# Altium PCB PCB1.PcbDoc
Units mm, origin at the board's own origin, x right, y up, seen from the top; angles counter-clockwise.
Board outline 86 x 56 mm, 2 copper layers (Top Layer, Bottom Layer), stack 1.771 mm thick; 8 components, 56 nets, 96 pads, 19 vias.
Unrouted connection lines stored in the file: 1.
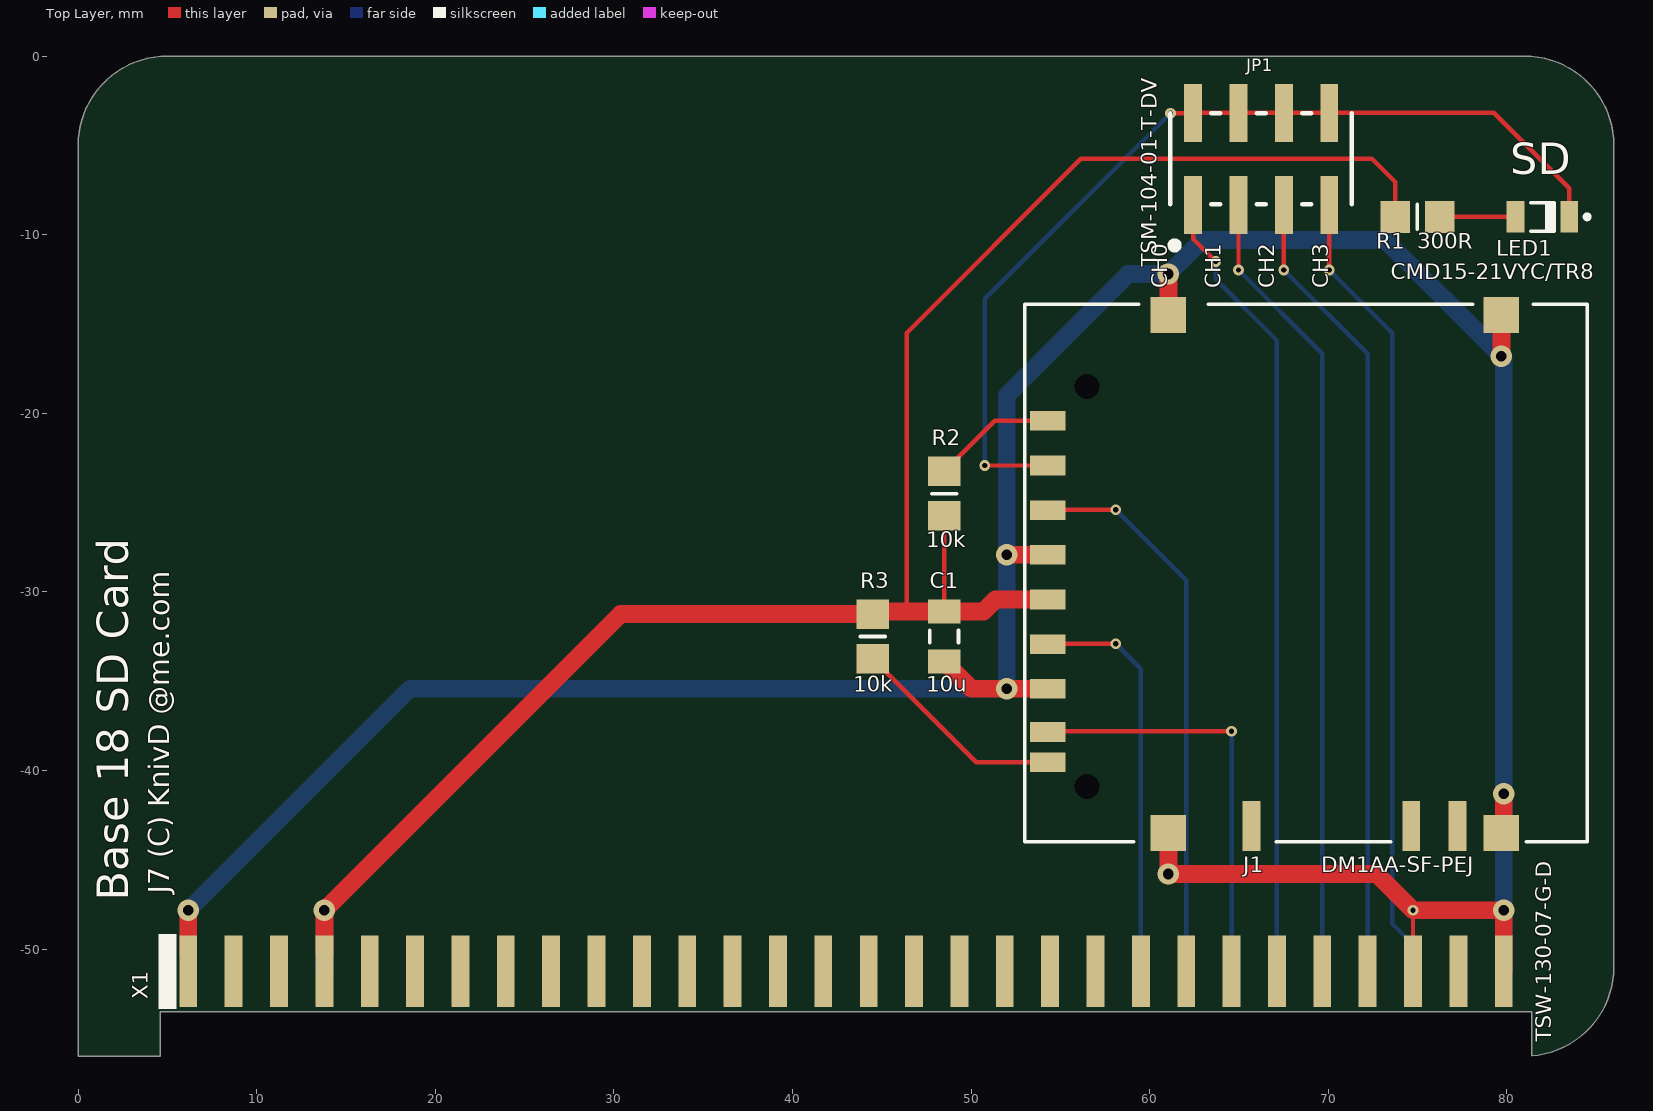
[diagram p0: Top Layer view]
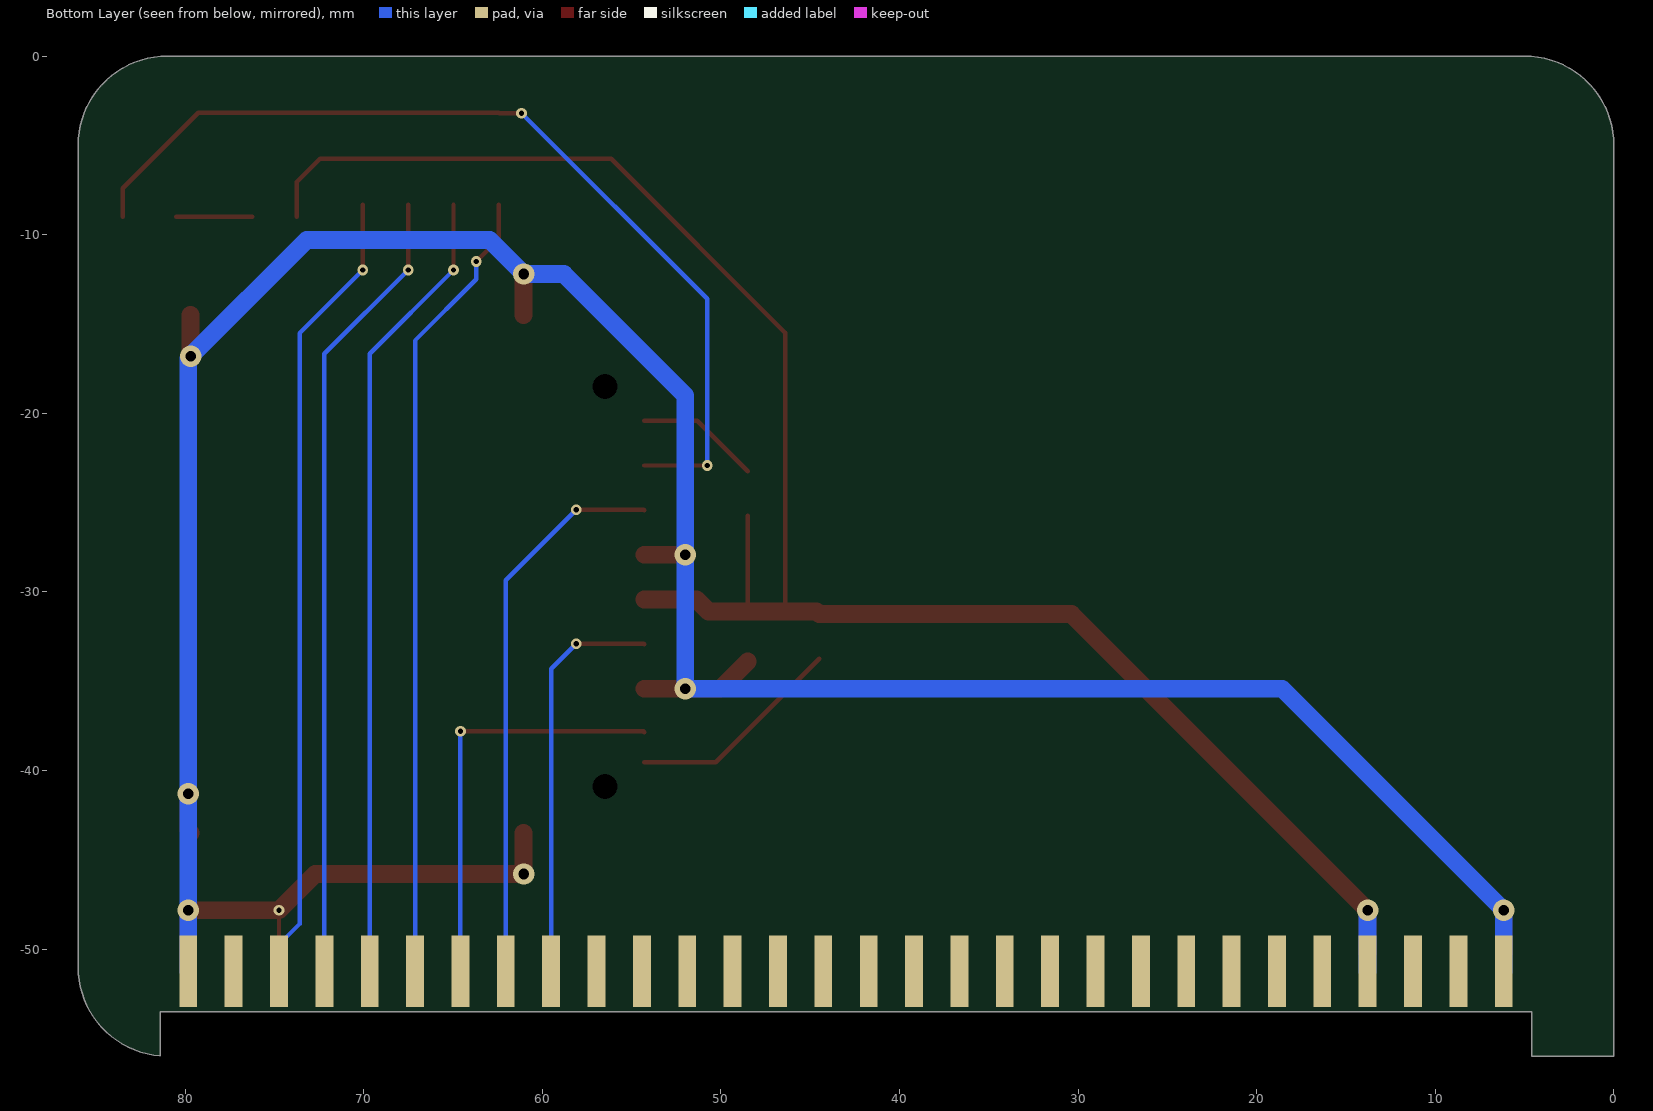
[diagram p1: Bottom Layer view, seen from below]
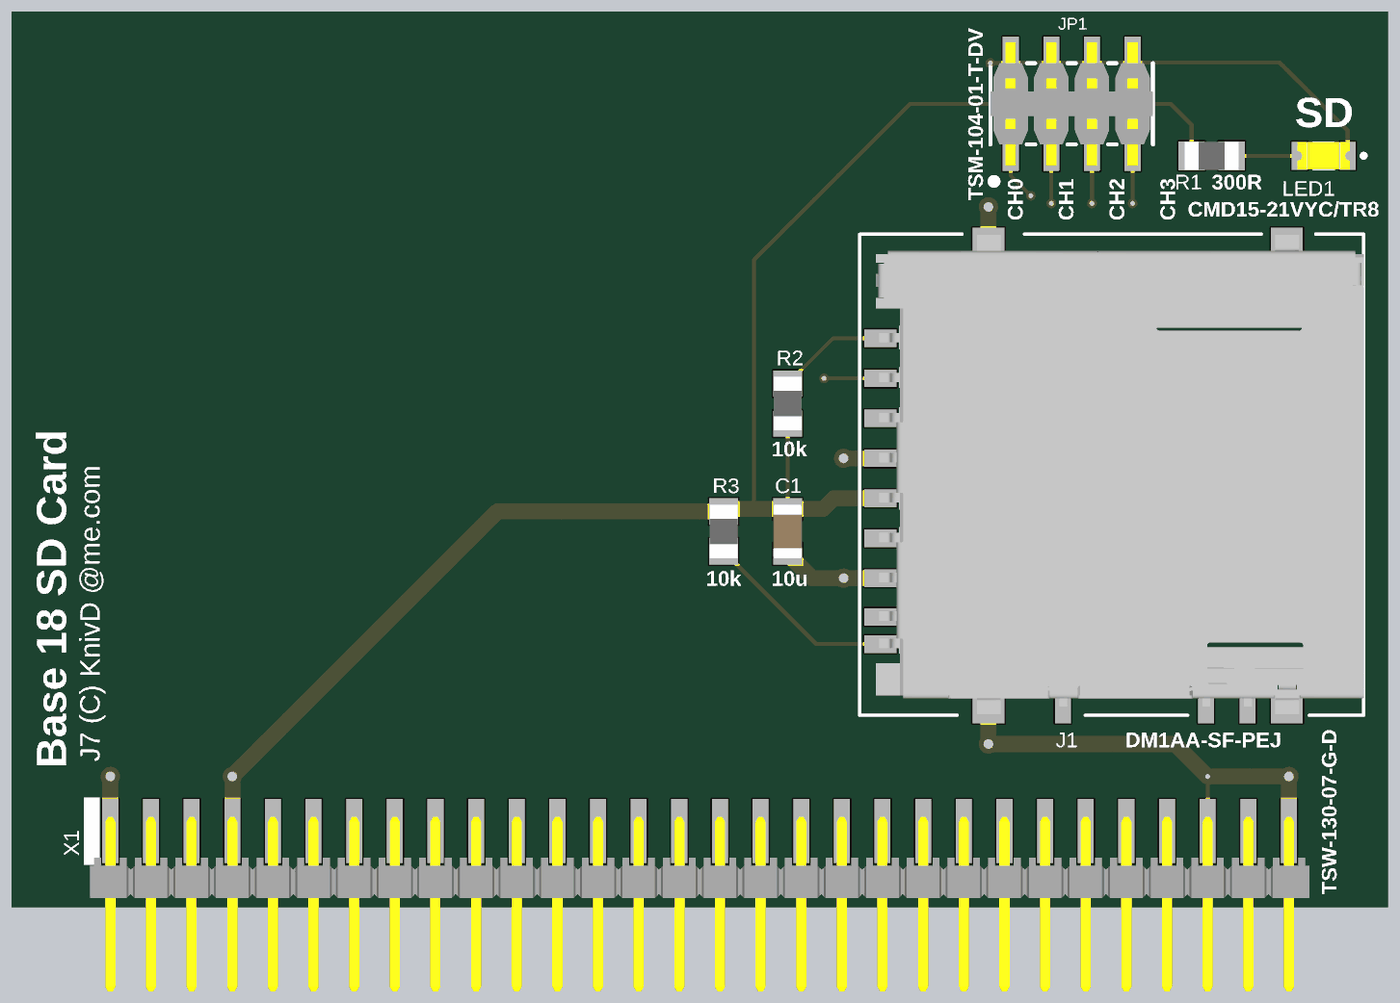
[diagram p2: 3D render of the assembled board from above, using the file's embedded part models]

## Layer stack, top to bottom
Top Solder: solder mask 0.0102, Solder Resist, Dk 3.5
Top Layer: signal copper 0.0356
Dielectric 1: core 1.7, FR-4, Dk 4.2
Bottom Layer: signal copper 0.0356
Solder Side: solder mask 0.0102, Solder Resist, Dk 3.5

## Board outline
0,-56 0,-5 cw(c5,-5) 5,0 81,0 cw(c81,-5) 86,-5 86,-51 cw(c81,-51) 81.399,-55.984 81.4,-55.984 81.4,-53.5 4.6,-53.5 4.6,-56

## Design rules (kind name [scope] priority, off if disabled: settings)
Clearance Clearance_Pour [IsRegion] p1: gap=0.3 ignorepadtopadclearanceinfootprint=TRUE
Clearance [All] p2: gap=0.2 ignorepadtopadclearanceinfootprint=TRUE
Height [All] p1: minheight=0 maxheight=100 prefheight=12.7
HoleSize [All] p1: absolutevalues=TRUE maxlimit=5 minlimit=0.025 maxpercent=80.000 minpercent=20.000
HoleToHoleClearance [All] p1: gap=0 allowstackedmicrovias=TRUE
MinimumSolderMaskSliver [All] p1: minsoldermaskwidth=0
PolygonConnect [All] p1: thpad.connectstyle=Relief thpad.reliefconductorwidth=0.25 thpad.reliefentries=4 thpad.polygonreliefangle="90 Angle" thpad.airgapwidth=0.25 smdpad.connectstyle=Relief smdpad.reliefconductorwidth=0.25 smdpad.reliefentries=4 smdpad.polygonreliefangle="90 Angle" smdpad.airgapwidth=0.25 via.connectstyle=Direct via.reliefconductorwidth=0.254 via.reliefentries=4 via.polygonreliefangle="45 Angle" via.airgapwidth=0.254
RoutingVias [All] p1: holewidth=0.3 width=0.6 viastyle="Through Hole" minholewidth=0.25 minwidth=0.5 maxholewidth=1.5 maxwidth=3
SilkToSilkClearance [All] p1: silktosilkclearance=-10
SilkToSolderMaskClearance [IsPad] p1: minsilkscreentomaskgap=-10 clearancetoexposedcopper=TRUE
SolderMaskExpansion SolderMaskExpansion_VIA [IsVia] p1: expansion=-0.3 soldermaskfromhole=TRUE
SolderMaskExpansion [All] p2: expansion=0.102
Width [All] p1: maxlimit=10 minlimit=0.2 preferedwidth=0.25
24 further rules are at their usual default settings.

## Components (designator, comment, footprint, x,y, rotation, side; value= is the part's Value field where it differs from the comment)
C1 "10u" CAPC3216X110N 48.5,-32.5 r270 top locked
J1 "DM1AA-SF-PEJ" DM1AA-SF-PEJ 67,-29 r90 top locked
JP1 "TSM-104-01-T-DV" 2015-2X04XD 66.25,-5.75 r0 top
LED1 "CMD15-21VYC/TR8" LED_OSRAM_LYN971 82,-9 r180 top locked
R1 "300R" RESC3216X75N 75,-9 r180 top locked
R2 "10k" RESC3216X75N 48.5,-24.5 r270 top locked
R3 "10k" RESC3216X75N 44.5,-32.5 r90 top locked
X1 "TSW-130-07-G-D" DIL60-M-EDGE 43,-50.45 r0 top locked

## Footprints (in the part's own frame and the unit in brackets; to place one, negate y for a bottom-side part, rotate by r counter-clockwise, add the part's x,y. Pads: shape width x height; smd on the part's side, far side on the other; paste and mask are expansions set on the pad)
2015-2X04XD [mm] "Pin Header, 2.54mm x 2.54mm"
  rect 1x3.25 smd: 1(-3.81,-2.575) 2(-3.81,2.575) 3(-1.27,-2.575) 4(-1.27,2.575) 5(1.27,-2.575) 6(1.27,2.575) 7(3.81,-2.575) 8(3.81,2.575)
  silkscreen extent -5.08,-5.05 5.08,2.54, body extent -5.08,-3.85 5.08,3.85, height 9.65
CAPC3216X110N [mm] "Chip Capacitor, Body 3.2x1.6mm, IPC Medium Density"
  rect 1.35x1.8 smd: 1(-1.4,0) 2(1.4,0)
  silkscreen extent -0.35,-0.8 0.35,0.8, body extent -1.7,-0.9 1.7,0.9, height 1.1
DIL60-M-EDGE [mm] "DIL60 header soldered as edge connector"
  rect 1x4 smd: 1(-36.83,-0.8) 3(-34.29,-0.8) 5(-31.75,-0.8) 7(-29.21,-0.8) 9(-26.67,-0.8) 11(-24.13,-0.8) 13(-21.59,-0.8) 15(-19.05,-0.8) 17(-16.51,-0.8) 19(-13.97,-0.8) 21(-11.43,-0.8) 23(-8.89,-0.8) 25(-6.35,-0.8) 27(-3.81,-0.8) 29(-1.27,-0.8) 31(1.27,-0.8) 33(3.81,-0.8) 35(6.35,-0.8) 37(8.89,-0.8) 39(11.43,-0.8) 41(13.97,-0.8) 43(16.51,-0.8) 45(19.05,-0.8) 47(21.59,-0.8) 49(24.13,-0.8) 51(26.67,-0.8) 53(29.21,-0.8) 55(31.75,-0.8) 57(34.29,-0.8) 59(36.83,-0.8)
  rect 1x4 smd far side: 2(-36.83,-0.8) 4(-34.29,-0.8) 6(-31.75,-0.8) 8(-29.21,-0.8) 10(-26.67,-0.8) 12(-24.13,-0.8) 14(-21.59,-0.8) 16(-19.05,-0.8) 18(-16.51,-0.8) 20(-13.97,-0.8) 22(-11.43,-0.8) 24(-8.89,-0.8) 26(-6.35,-0.8) 28(-3.81,-0.8) 30(-1.27,-0.8) 32(1.27,-0.8) 34(3.81,-0.8) 36(6.35,-0.8) 38(8.89,-0.8) 40(11.43,-0.8) 42(13.97,-0.8) 44(16.51,-0.8) 46(19.05,-0.8) 48(21.59,-0.8) 50(24.13,-0.8) 52(26.67,-0.8) 54(29.21,-0.8) 56(31.75,-0.8) 58(34.29,-0.8) 60(36.83,-0.8)
  silkscreen extent -38.5,-2.9 -37.5,1.3, body extent -38.1,-10.83 38.1,0.09, height 1.64
DM1AA-SF-PEJ [mm] "HIROSE SD card push-push socket"
  rect 2x2 smd: 0(-14.5,-12.7) 0(-14.5,5.95) 0(14.5,-12.7) 0(14.5,5.95)
  round 0 hole 1.4: 0(-11.9,10.5) 0(10.5,10.5)
  rect 1.1x2 smd: 1(6.075,12.7) 2(3.575,12.7) 3(1.075,12.7) 4(-1.425,12.7) 5(-3.925,12.7) 6(-6.425,12.7) 7(-8.85,12.7) 8(-10.55,12.7) 9(8.575,12.7)
  rect 2.8x1 smd: COM(-14.1,-10.25) DET(-14.1,1.3) WP(-14.1,-7.65)
  silkscreen extent -15,-17.5 15.1,14, body extent -14.95,-17.52 15.05,12.98, height 2.88
LED_OSRAM_LYN971 [mm] "Yellow Chip LED, 2-Leads, Body 3.2 x1.6mm, IPC Medium Density"
  rect 1x1.75 smd: 1(-1.5,0) 2(1.5,0)
  silkscreen extent -2.63,-0.8 0.65,0.8, body extent -1.65,-0.85 1.65,0.85, height 1.2
RESC3216X75N [mm] "Chip Resistor, EIA 1206, Metric 3216, Body 3.2x1.6mm, IPC Medium Density"
  rect 1.65x1.8 smd: 1(-1.25,0) 2(1.25,0)
  silkscreen extent 0,-0.7 0,0.7, body extent -1.67,-0.87 1.68,0.88, height 0.75

## Part data
C1: library part Capacitor, "Capacitor"
J1: library part "SD (w/ card detect and WP)", "SD card connector"
JP1: library part "Jumper 4x2", "2.54mm square pin header/jumper"
LED1: library part LED, "Light Emitting Diode"
R1 R2 R3: library part Resistor, "Resistor"
X1: library part "Connector 2x30", "Dual row, 60-way connector"

## Via types
v1: diameter 0.6, hole 0.3, Top Layer to Bottom Layer, tented both sides, 10 vias
v2: diameter 1.2, hole 0.6, Top Layer to Bottom Layer, tented both sides, 9 vias

## Nets (pads, with @x,y where several pads share a name; then routed paths per layer and width w, separated by ;. In a path a pad name is that pad's centre, name@x,y a point inside that pad or via, vN(x,y) a via of type N, cw(c..) or ccw(c..) an arc to the next point about the centre after c; other vN are vias at no path point)
+3V3: C1.1 J1.4 R1.2 R2.2 R3.2 X1.7 X1.8 | length 108.4
  Top Layer w0.25: 46.4,-31.1 46.4,-15.5 56.15,-5.75 72.45,-5.75 73.75,-7.05 R1.2 ; C1.1 R2.2
  Top Layer w1: X1.7@13.79,-50.25 v2(13.79,-47.83) 30.37,-31.25 R3.2 44.65,-31.1 C1.1 50.7,-31.1 51.375,-30.425 J1.4
  Bottom Layer w1: X1.8 v2(13.79,-47.83)
+Vin: X1.57 X1.58
A00: X1.15
A01: X1.17
A02: X1.19
A03: X1.21
A04: X1.23
A05: X1.25
A06: X1.27
A07: X1.29
A08: X1.31
A09: X1.33
A10: X1.35
A11: X1.37
A12: X1.16
A13: X1.18
A14: X1.20
A15: X1.22
A16: X1.24
A17: X1.26
A18: X1.28
A19: X1.30
A20: X1.32
A21: X1.34
A22: X1.36
A23: X1.38
BUS#: X1.10
DB0: X1.39
DB1: X1.41
DB2: X1.43
DB3: X1.45
DB4: X1.47
DB5: X1.49
DB6: X1.51
DB7: X1.53
GND: C1.2 J1.0@61.05,-14.5 J1.0@61.05,-43.5 J1.0@79.7,-14.5 J1.0@79.7,-43.5 J1.3 J1.6 X1.1 X1.2 X1.55 X1.59 X1.60 | length 186.1
  Top Layer w0.25: X1.55 v1(74.75,-47.83)
  Top Layer w1: X1.1@6.17,-50.25 v2(6.17,-47.83) ; C1.2 50.025,-35.425 v2(52,-35.425) J1.6 ; v2(52,-27.925) J1.3 ; J1.0@61.05,-43.5 v2(61.05,-45.8) 72.72,-45.8 v1(74.75,-47.83) v2(79.83,-47.83) X1.59 ; J1.0@61.05,-14.5 v2(61.05,-12.2) ; J1.0@79.7,-43.5 79.83,-43.37 v2(79.83,-41.3) ; v2(79.7,-16.8) J1.0@79.7,-14.5
  Bottom Layer w1: X1.2 v2(6.17,-47.83) 18.575,-35.425 v2(52,-35.425) v2(52,-27.925) 52,-19 58.8,-12.2 v2(61.05,-12.2) 62.95,-10.3 73.2,-10.3 v2(79.7,-16.8) 79.83,-16.93 v2(79.83,-41.3) v2(79.83,-47.83) X1.60
INT0#: X1.9
INT1#: X1.11
INT2#: X1.13
MCLR#: X1.5
MISO: J1.7 X1.48 | length 23.7
  Top Layer w0.25: J1.7 54.34,-37.81 v1(64.59,-37.81)
  Bottom Layer w0.25: X1.48 v1(64.59,-37.81)
MOSI: J1.2 X1.46 | length 31.3
  Top Layer w0.25: J1.2 54.325,-25.4 v1(58.1,-25.4)
  Bottom Layer w0.25: v1(58.1,-25.4) 62.05,-29.35 X1.46
NetJ1_8: J1.8 R3.1 | length 12.2
  Top Layer w0.25: R3.1 50.3,-39.55 J1.8
NetJ1_9: J1.9 R2.1 | length 7
  Top Layer w0.25: R2.1 51.325,-20.425 J1.9
NetLED1_2: LED1.2 R1.1 | length 4.2
  Top Layer w0.25: R1.1 LED1.2
RD#: X1.14
RESET#: X1.6
RXD: X1.42
SCLK: J1.5 X1.44 | length 22.7
  Top Layer w0.25: J1.5 54.325,-32.9 v1(58.1,-32.9)
  Bottom Layer w0.25: v1(58.1,-32.9) 59.51,-34.31 X1.44
SD#: J1.1 JP1.2 JP1.4 JP1.6 JP1.8 LED1.1 | length 53.2
  Top Layer w0.25: v1(50.775,-22.925) J1.1 ; v1(61.17,-3.2) 62.415,-3.2 JP1.2 JP1.4 JP1.6 JP1.8 79.275,-3.175 83.5,-7.4 LED1.1
  Bottom Layer w0.25: v1(50.775,-22.925) 50.775,-13.595 v1(61.17,-3.2)
SEL0#: JP1.1 X1.50 | length 44.9
  Top Layer w0.25: JP1.1 62.44,-10.24 v1(63.7,-11.5)
  Bottom Layer w0.25: v1(63.7,-11.5) 63.7,-12.5 67.13,-15.93 X1.50
SEL1#: JP1.3 X1.52 | length 44.9
  Top Layer w0.25: v1(64.98,-11.98) JP1.3
  Bottom Layer w0.25: v1(64.98,-11.98) 69.67,-16.67 X1.52
SEL2#: JP1.5 X1.54 | length 44.9
  Top Layer w0.25: v1(67.52,-11.98) JP1.5
  Bottom Layer w0.25: v1(67.52,-11.98) 72.21,-16.67 X1.54
SEL3#: JP1.7 X1.56 | length 44.9
  Top Layer w0.25: v1(70.06,-11.98) JP1.7
  Bottom Layer w0.25: v1(70.06,-11.98) 73.6,-15.52 73.6,-48.6 74.75,-49.75 X1.56
TXD: X1.40
WR#: X1.12
pads on no net: J1.0@56.5,-18.5 J1.0@56.5,-40.9 J1.COM J1.DET J1.WP X1.3 X1.4

## Silkscreen, mask and mechanical layers (free items; w line width, h text height)
Top Overlay:
  text "SD" at 80.2,-7.2 h3
  text "CH0 /  / CH1 /  / CH2 /  / CH3" at 70.3,-13 h1.5 r90
  text "J7 (C) KnivD @me.com" at 5.5,-46.9 h2 r90
  text "Base 18 SD Card" at 3.4,-47.3 h3 r90
Mechanical 1:
  lines w0.4: 81.399,-55.984 ccw(c81,-51) 86,-51 86,-5 ccw(c81,-5) 81,0 5,0 ccw(c5,-5) 0,-5 0,-56 4.6,-56 4.6,-53.5 81.4,-53.5 81.4,-55.984
Drill Drawing:
  text "PCB parameters: HASL, FR-4, 1.8mm / 1oz, green soldermask, white overlay" at 7.5,-69 h2